# EAGLE board WaterProbe_3 (EAGLE 9.1.3)
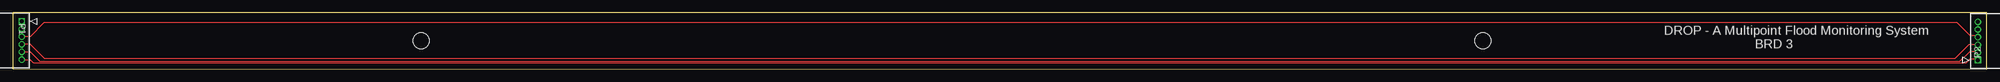
[diagram p0: board, top side]

Size 386.74 x 11.04 mm. Coordinates in mm from the lower left corner, seen from the top.
Outline: 0,0.04 386.74,0 386.74,11 0,11.04 0,0.04
Copper layers (1*16): Top 0.035mm / dielectric 1.5mm / Bottom 0.035mm
Design rules "default": minimum track width 6mil, minimum drill 0.35mm, track to track 6mil, track to pad 6mil, pad to pad 6mil, via to via 6mil, smd to smd 6mil, copper to edge 40mil, drill to drill 6mil, minimum pad ring 10mil, minimum via ring 8mil, stop-mask expansion 4mil, vias tented up to drill 0mil, thermal gap 10mil
Holes 3.2 mm at 80,5.54 288,5.54

## Footprints (pad centres in the part's own frame; a part is rotated, then mirrored left to right if it is on the bottom)
S6B-ZR = drill 0.762 pad 1.27 square: 1 -7.493,0 | drill 0.762 pad 1.27: 2 -5.994,0; 3 -4.496,0; 4 -2.997,0; 5 -1.499,0; 6 0,0

## Placement (x,y rotation side)
P1  6PINJSTS6B-ZR(LF)(SN)  [S6B-ZR]  1.76,1.87 270 top
P2  6PINJSTS6B-ZR(LF)(SN)  [S6B-ZR]  385.01,9.26 90 top

## Library data of the parts
P1 P2 = DROP 6pin JST; MANUFACTURER_PART_NUMBER: S6BZRLFSN; VENDOR: JST

## Nets
N$1: P1.6 P2.1
N$2: P1.5 P2.2
N$3: P1.4 P2.3
N$4: P1.3 P2.4

## Tracks (layer width: path | path; a pad name or v marks a point on that pad's centre or on a via)
N$1
  Top 0.152: P1.6 3.42,1.87 4.05,1.24 382.69,1.24 383.5,2.04 384.74,2.04 P2.1
N$2
  Top 0.152: P1.5 3.42,3.37 5.25,1.54 381.5,1.54 383.5,3.54 384.74,3.54 P2.2
N$3
  Top 0.152: P2.3 383.22,4.76 380.5,2.04 6.25,2.04 3.42,4.87 P1.4
N$4
  Top 0.152: P1.3 3.42,6.37 6.1,9.04 381,9.04 383.5,6.54 384.73,6.54 P2.4

## Text on the board
tNames: DROP - A Multipoint Flood Monitoring System / BRD 3